# Altium PCB ETR_CELLMETER_MASTER.PcbDoc (part 3 of 3)
Units mm, origin at the board's own origin, x right, y up, seen from the top; angles counter-clockwise.
Board outline 110 x 70.06 mm, 4 copper layers (Top Layer, Top Inner, Bottom Inner, Bottom Layer), stack 0.96 mm thick; 181 components, 86 nets, 555 pads, 321 vias.
Unrouted connection lines stored in the file: 15.
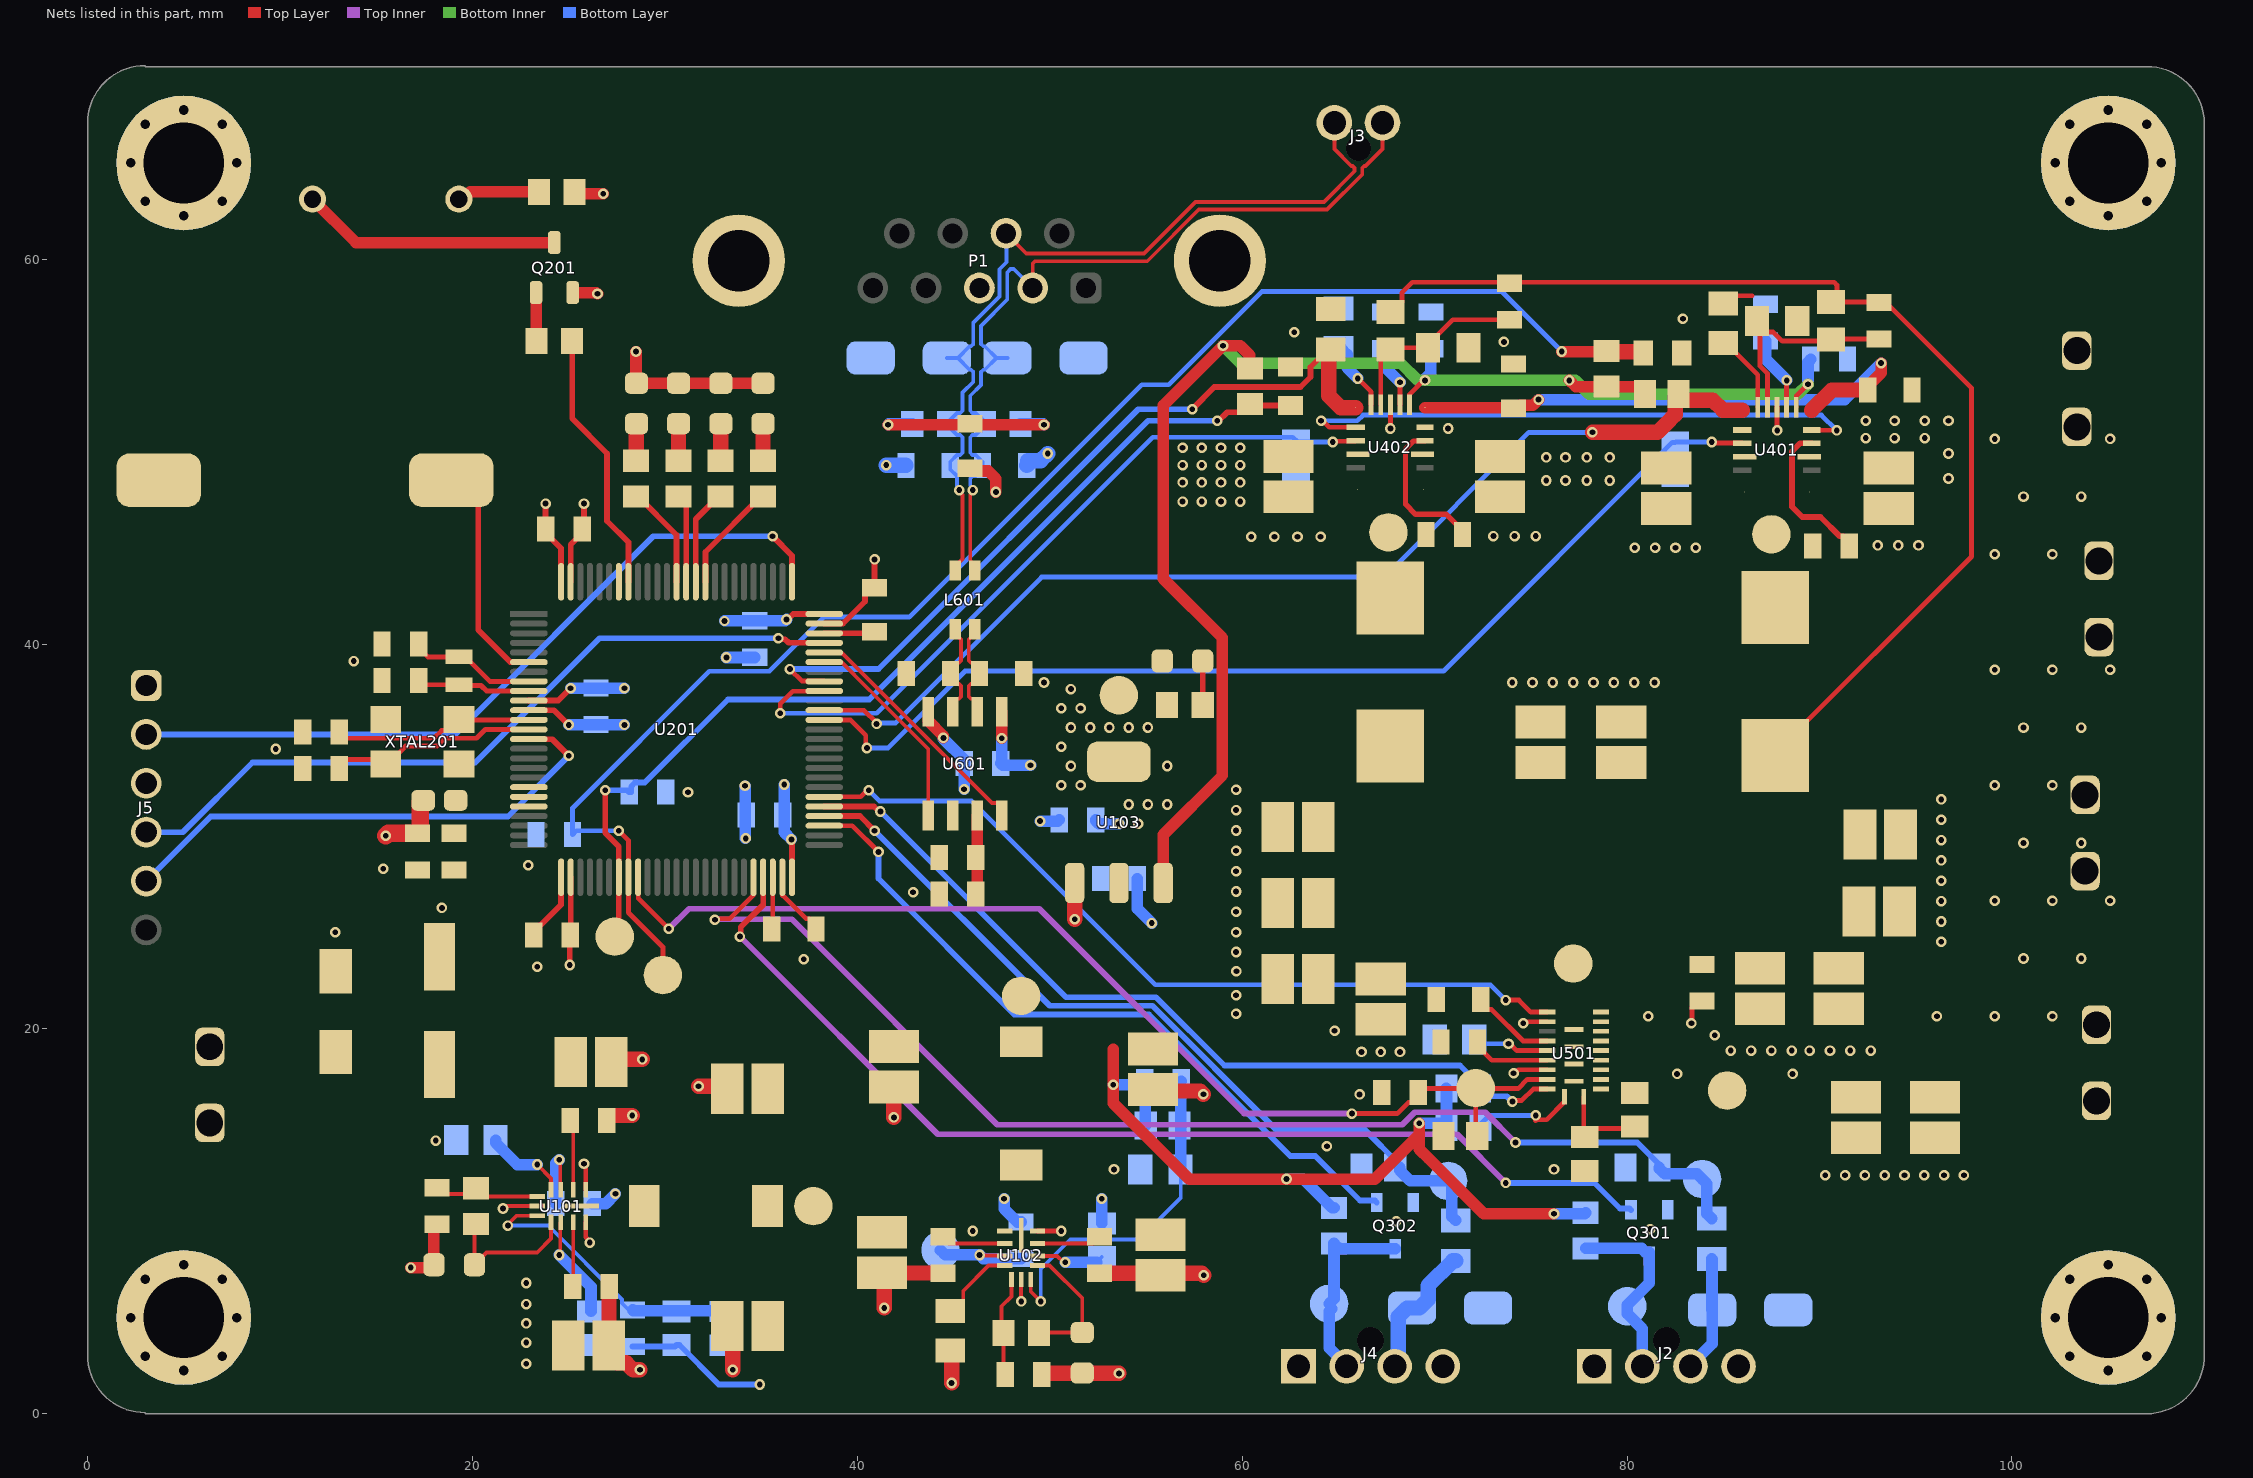
[diagram p4: the nets of this part, all layers, seen from the top]

## Part data (continued)
R601 R602: library part CMP-00080-1, "Res Thin Film 0805 60.4 Ohm 0.1% 1/8W ±25ppm/°C Molded SMD SMD Punched Carrier T/R", Case Code (Metric)=2012, Case/Package=0805, Manufacturer 1=Panasonic, Manufacturer Part Number 1=ERA-6AEB60R4V, Max Operating Temperature=155°C, Max Power Dissipation=125mW, Min Operating Temperature=-55°C, Package Quantity=5000, Resistor Type="Thin Film,Metal Film", Temperature Coefficient=25ppm/°C, Tolerance=0.1%, Voltage Rating=200V, Voltage Rating (DC)=100V, .Creator=DR, Category="Chip SMD Resistors", ComponentLink1Description=https://datasheet.ciiva.com/11811/0900766b80eb1d8c-11811180.pdf?src-supplier=RSComponents, ComponentLink1URL=https://datasheet.ciiva.com/11811/0900766b80eb1d8c-11811180.pdf?src-supplier=RSComponents, ComponentLink2Description=https://datasheet.ciiva.com/41450/001181146-da-01-en-widerstand-era-0805-60r4-0-1-5000st-41450303.pdf?src-supplier=Conrad, ComponentLink2URL=https://datasheet.ciiva.com/41450/001181146-da-01-en-widerstand-era-0805-60r4-0-1-5000st-41450303.pdf?src-supplier=Conrad, ComponentLink3Description=https://datasheet.ciiva.com/5951/485442-5951173.pdf?src-supplier=Farnell, ComponentLink3URL=https://datasheet.ciiva.com/5951/485442-5951173.pdf?src-supplier=Farnell, ComponentLink4Description=https://datasheet.ciiva.com/30184/54aoa0000ce26-30184022.pdf?src-supplier=Onlinecomponents.com, ComponentLink4URL=https://datasheet.ciiva.com/30184/54aoa0000ce26-30184022.pdf?src-supplier=Onlinecomponents.com, ComponentLink5Description=https://datasheet.ciiva.com/9188/aoa0000ce26-9188476.pdf?src-supplier=Avnet, ComponentLink5URL=https://datasheet.ciiva.com/9188/aoa0000ce26-9188476.pdf?src-supplier=Avnet, Contact Plating=Tin, Depth=1.25mm, Design Item ID=R60-0805FTN, Features="Automotive AEC-Q200", Height=0.5mm, Lead Free="Lead Free", Length=2mm, Mount="Surface Mount", Number of Terminations=2, Packaging="Tape and Reel", Pins=2, Power rating=125mW, Pricing 1="1=0,04650, 10=0,03900, 100=0,02860 (USD)", Radiation Hardening=No, RoHS=Yes, Source=Passives.SchLib, Stock 1=5000, Termination=SMD/SMT, Weight=0.000194oz, Width=1.25mm
TP101 TP102 TP103 TP104 TP201 TP202 TP301 TP302 TP303 TP304 TP401 TP402 TP403 TP501 TP502: library part CMP-00042-1, "Test Point 1x1 mm", .Creator=GP, .PCBcheck=GP, .SCHcheck=GP, Category=TestPoint, Design Item ID=TestPoint, Source=e-Tech_Racing.SchLib
U101 U102: library part CMP-031-00007-2, "MPQ4323 – 42V LOAD DUMP, 3A, LOW IQ, SYNC STEP-DOWN CONVERTER, AEC-Q100", Case/Package="QFN12 (2mmx3mm)", Max Operating Temperature=150°C, Max Supply Voltage=36V, Min Operating Temperature=-40°C, Min Supply Voltage=3.3V, Mounting Technology=SMD, Pins=12, RoHS Compliant=Yes
U103: library part LDO_10V-0.8/3V3-SOT223, "LDO Regulator Pos 3.3V 0.8A 4-Pin(3+Tab) SOT-223 T/R / IC REG LDO 3.3V 0.8A SOT223", Case/Package=SOT-223, Current Rating=800A, Dropout Voltage=1.2V, Manufacturer="Texas Instruments", Max Input Voltage=15V, Max Operating Temperature=125°C, Max Output Current=800mA, Max Supply Voltage=10V, Min Input Voltage=2.6V, Min Operating Temperature=-40°C, Min Supply Voltage=4.75V, Nominal Output Voltage=3.3V, Output Voltage Accuracy=1%, Package Quantity=1000, Quiescent Current=15mA, Supplier Part Number 1=LM1117IMP-3.3/NOPBCT-ND, .Creator=GP, Accuracy=1%, Category=LDO, ComponentLink1Description=Datasheet, ComponentLink1URL=https://www.ti.com/lit/ds/symlink/lm1117.pdf?HQS=dis-mous-null-mousermode-dsf-pf-null-wwe&DCM=yes&ref_url=https%3A%2F%2Fwww.mouser.de%2F&distId=26, ComponentLink2Description="Where buy it", ComponentLink2URL=https://www.mouser.es/ProductDetail/Texas-Instruments/LM1117IMP-33-NOPB?qs=X1J7HmVL2ZFbpN1TgOsjYQ%3D%3D, ComponentLink3Description=https://datasheet.ciiva.com/27051/1281318-27051810.pdf?src-supplier=Jameco, ComponentLink3URL=https://datasheet.ciiva.com/27051/1281318-27051810.pdf?src-supplier=Jameco, ComponentLink4Description=https://datasheet.ciiva.com/8042/1670636-8042261.pdf?src-supplier=Element14, ComponentLink4URL=https://datasheet.ciiva.com/8042/1670636-8042261.pdf?src-supplier=Element14, ComponentLink5Description=https://datasheet.ciiva.com/1570/1849796-1570171.pdf?src-supplier=Farnell, ComponentLink5URL=https://datasheet.ciiva.com/1570/1849796-1570171.pdf?src-supplier=Farnell, ComponentLink6Description=https://datasheet.ciiva.com/14149/lm1117-eng-tds-14149980.pdf?src-supplier=Distrelec, ComponentLink6URL=https://datasheet.ciiva.com/14149/lm1117-eng-tds-14149980.pdf?src-supplier=Distrelec, ComponentLink7Description=https://datasheet.ciiva.com/46386/1882372-46386042.pdf?src-supplier=Element14, ComponentLink7URL=https://datasheet.ciiva.com/46386/1882372-46386042.pdf?src-supplier=Element14, ComponentLink8Description=https://datasheet.ciiva.com/3223/lm1117-n-3223515.pdf?src-supplier=Avnet, ComponentLink8URL=https://datasheet.ciiva.com/3223/lm1117-n-3223515.pdf?src-supplier=Avnet, ComponentLink9Description=https://datasheet.ciiva.com/6580/lm1117-n-6580030.pdf?src-supplier=Digi-Key, ComponentLink9URL=https://datasheet.ciiva.com/6580/lm1117-n-6580030.pdf?src-supplier=Digi-Key, ComponentLink10Description=https://datasheet.ciiva.com/6580/lm1117-n-6580026.pdf?src-supplier=Digi-Key, ComponentLink10URL=https://datasheet.ciiva.com/6580/lm1117-n-6580026.pdf?src-supplier=Digi-Key, Height=1.6mm, Lead Free="Lead Free", Length=6.5mm, Manufacturer Part Number=LM1117IMP-3.3/NOPB, Min Current Limit=800mA, Mount="Surface Mount", Number of Outputs=1, Number of Pins=4, Number of Regulators=1, Output Current=800mA, Output Type=Fixed, Output Voltage=3.3V, Packaging="Tape and Reel", Polarity=Positive, Pricing 1="1=1,41000, 10=1,26300, 25=1,19920, 100=0,98500, 250=0,92072, 500=0,81366 (USD)", Radiation Hardening=No, REACH SVHC="No SVHC", RoHS=Yes, RoHS Compliant=Yes, Supplier 1=Digi-Key, Termination=SMD/SMT, Width=3.56mm
U201: library part CMP-031-00006-1, "RISC Microcontroller, 32-Bit, FLASH, 400MHz, CMOS, PQFP100", RoHS Compliant=Yes
U401 U402: library part CMP-00193-6, "MPQ4371GVE-1000-AEC1-Z High Voltage DCDC 10 A"
U501: library part CMP-019-00005-1, "7mΩ Protection Switch with Current Monitor for Automotive Battery Systems AEC-Q100 Qualified"
U601: library part CMP-015-00000-1, "CAN Transceiver, 1-Trnsvr, PDSO8", RoHS Compliant=Yes
V201: library part CMP-00028-00008-3, "237-8301 Portapilas para 1 pila CR1220, montaje Montaje superficial"
XTAL201: library part CMP-003-00000-1, "WE-XTAL Quartz Crystal, SMT, CFPX-104, 16MHz, +/-50ppm", Case/Package=CFPX-104, Frequency=16MHz, Frequency Stability=+/-50ppm, Load Capacitance=18pF, Manufacturer="Wurth Elektronik", Operating Temperature Max=60°C, Operating Temperature Min=-10°C, Category=Crystals, Component Type=Standard, ComponentLink1Description="Website Link", ComponentLink1URL=https://www.we-online.com/redexpert/article/830030819?ad, ComponentLink2Description="Datasheet Link", ComponentLink2URL=https://www.we-online.com/redexpert/spec/830030819?ad, Design Item ID=830030819, Frequency Tolerance=+/-50ppm, Height=1mm, Length=5mm, Manufacturer Part Number=830030819, Match Code=WE-XTAL, Mount="Surface Mount", Packaging="Tape and Reel", Pins=4, Source=WE-XTAL.SchLib, Width=3.2mm
XTAL202: library part CMP-105-000000-1, Design Item ID=XTAL_SMD_32.768kHz, Source=CommonFiles_Library.SchLib

## Via types
v1: diameter 0.55, hole 0.3, Top Layer to Bottom Layer, 277 vias
v2: diameter 0.7, hole 0.5, Top Layer to Bottom Layer, 32 vias
v3: diameter 2.5, hole 2.3, Top Layer to Bottom Layer, 5 vias
v4: diameter 4.4, hole 4.2, Top Layer to Bottom Layer, 4 vias
v5: diameter 1.4, hole 1.2, Top Layer to Bottom Layer, 1 vias
v6: diameter 1.6, hole 1.4, Top Layer to Bottom Layer, 1 vias
v7: diameter 0.5, hole 0.3, Top Layer to Bottom Layer, 1 vias

## Nets (pads, with @x,y where several pads share a name; then routed paths per layer and width w, separated by ;. In a path a pad name is that pad's centre, name@x,y a point inside that pad or via, vN(x,y) a via of type N, cw(c..) or ccw(c..) an arc to the next point about the centre after c; other vN are vias at no path point)
3V3_A: C213.2 L201.2 U201.20 U201.21
3V3_MCU: C121.2 C207.2 C208.2 C209.2 C210.2 C211.2 C212.2 C605.2 J5.1 L201.1 R111.2 R201.2 TP104.1 U103.2 U103.4 U201.11 U201.27 U201.50 U201.75 U201.100 U601.5 | length 35.4
  Top Layer w0.3: U201.11@22.932,36.56 24.24,36.56 v1(25,35.8) ; v1(23.8,47.3) 23.8,45.989 C211.2@23.815,45.974 23.815,45.774 24.607,44.982 U201.100@24.607,43.235 ; v1(25.061,23.324) 25.061,24.873 25.107,24.919 U201.27@25.107,27.885 ; v1(36.322,41.275) 36.39,41.275 36.675,41.56 U201.75@38.282,41.56 ; v1(36.576,29.845) 36.605,29.816 36.605,27.887 U201.50@36.607,27.885
  Top Layer w0.6: R201.2@25.309,63.5 25.409,63.4 v1(26.8,63.4) ; U601.5@47.498,36.482 47.498,35.102 v1(47.5,35.1)
  Top Layer w0.9: v1(15.494,30.033) 15.621,30.16 C212.2@17.145,30.16 17.297,30.16 17.297,31.787 17.387,31.877 L201.1@17.448,31.877
  Bottom Layer w0.6: v1(25,35.8) v1(27.9,35.8) ; v7(33.1,41.2) 36.247,41.2 v1(36.322,41.275) ; v1(36.2,32.7) 36.2,30.221 v1(36.576,29.845) ; v1(47.5,35.1) 47.5,33.85 C605.2@47.45,33.8 47.55,33.7 v1(49,33.7) ; C121.2@52.385,30.861 52.385,30.811 52.535,30.661 v1(53.6,30.661)
  other v1: 54.6,30.661 54.1,31.661 55.1,31.661 56.1,31.661 50.6,32.661 51.6,32.661 51.1,33.661 56.1,33.661 50.6,34.661 51.1,35.661 52.1,35.661 53.1,35.661 54.1,35.661 55.1,35.661 50.6,36.661 51.6,36.661 51.1,37.661
+5: C112.2 C113.2 C114.2 C120.2 C408.1 C420.1 C601.2 C602.2 L102.2 R107.2 R203.2 R204.2 R302.2 R305.2 R403.1 R502.2 R504.2 TP103.1 U103.3 U401.14 U402.14 U601.3 | length 126.3
  Top Layer w0.25: U402.14@68.7,52.436 U402.14@68.7,52.5 ; U402.14@68.7,52.5 68.7,52.981 69.361,53.643 69.443,53.643 v1(69.5,53.7) ; U401.14@88.789,52.303 88.789,52.889 v1(89.4,53.5)
  Top Layer w0.6: C601.2@46.15,27 46.228,27.078 U601.3@46.228,31.082 ; 53.3,18.948 53.3,16.137 57.245,12.192 62.292,12.192 v1(62.3,12.2) 62.308,12.192 66.892,12.192 69.2,14.5 ; U103.3@55.894,27.584 55.894,30.094 58.973,33.173 58.973,40.327 55.9,43.4 55.9,52.4 v1(59,55.5) 59.9,55.5 60.4,55 R204.2@60.4,54.325 ; v1(69.2,15.1) 69.2,13.756 69.703,13.253 72.556,10.4 v1(76.2,10.4) ; v1(77,53.7) 77.322,53.378 R203.2@78.939,53.378 80.65,53.378 80.925,53.103 R403.1@80.925,53
  Bottom Inner w0.6: v1(59,55.5) 59.9,54.6 68.225,54.6 69.125,53.7 v1(69.5,53.7) v1(77,53.7) 77.3,53.7 78.025,52.975 88.875,52.975 v1(89.4,53.5)
  Bottom Layer w0.6: v1(53.3,17.1) 54.78,17.1 C114.2@54.93,17.25 ; C120.2@54.544,27.813 54.544,26.256 v1(55.3,25.5) ; C114.2@54.93,17.272 54.961,17.241 54.961,15.016 R107.2@54.991,14.986 ; v1(62.3,12.2) 63.174,12.2 64.67,10.704 R305.2@64.77,10.704 ; v1(69.2,15.1) 70.425,15.1 R502.2@70.616,14.909 ; v1(69.5,53.7) 69.5,53.781 69.8,54.081 C420.1@69.8,55.35 ; R504.2@70.606,16.907 70.616,16.898 R502.2@70.616,14.909 ; R502.2@70.625,14.9 R502.2@70.616,14.909 ; v1(76.2,10.4) 77.801,10.4 R302.2@77.851,10.45 ; v1(89.4,53.5) 89.4,54.65 C408.1@89.55,54.8
+12: C102.2 C103.2 C105.2 C115.2 C116.2 C117.2 C118.2 J2.1 J4.1 L101.2 R102.2 R106.2 TP101.1 U102.2 U102.10 | length 15.5
  Top Layer w0.2: C117.2@44.45,9.205 44.798,8.857 U102.2@47.664,8.857 ; U102.10@49.364,8.857 52.23,8.857 C118.2@52.578,9.205
  Bottom Layer w0.3: C105.2@28.321,3.495 30.532,3.495 R102.2@30.607,3.57 30.757,3.57 32.803,1.524 v1(34.925,1.524)
  Bottom Layer w0.6: R106.2@52.705,9.892 v1(52.705,11.176)
+12F: C504.2 C505.2 J6.2 J7.2 J8.2 J9.2 R501.2 TP501.1 U501.12 U501.13 U501.14 U501.15 U501.16 U501.17 U501.18 U501.19 U501.20
  other v1: 82.6,17.661 88.6,17.661 81.1,20.661 96.1,20.661 99.1,20.661 102.1,20.661 100.6,23.661 103.6,23.661 99.1,26.661 102.1,26.661 105.1,26.661 100.6,29.661 103.6,29.661 99.1,32.661 102.1,32.661 100.6,35.661 103.6,35.661 99.1,38.661 102.1,38.661 105.1,38.661 99.1,44.661 102.1,44.661 100.6,47.661 103.6,47.661 99.1,50.661 105.1,50.661
+12S: C404.1 C405.1 C406.1 C407.1 C414.1 C415.1 C416.1 C417.1 C421.2 C422.2 C501.2 C502.2 C503.2 L401.2 L402.2 R402.1 R407.1 TP402.1 U501.21 U501.22 U501.23 U501.24 U501.25 | length 57.7
  Top Layer w0.25: R407.1@67.7,57.254 67.796,57.254 68.3,57.758 68.3,58.254 68.846,58.8 73.9,58.8 90.754,58.8 90.9,58.654 90.9,58.077 R402.1@90.6,57.777 93.423,57.777 97.9,53.3 97.9,44.55 87.7,34.35 L401.2@87.7,34.2
+24: C104.1 C106.2 C107.2 C108.2 C109.2 C402.1 C403.1 C412.1 C413.1 D101.2 J1.2 R101.2 R401.1 R406.1 U101.2 U101.10 U401.4 U401.10 U402.4 U402.10 | length 7
  Top Layer w0.2: C109.2@25.085,15.24 25.24,15.085 U101.2@25.24,11.645 ; C108.2@25.212,6.604 25.24,6.632 U101.10@25.24,9.945
  other v1: 22.8,2.6 22.8,3.7 22.8,4.7 22.8,5.7 22.8,6.8 56.9,47.4 57.9,47.4 58.9,47.4 59.9,47.4 56.9,48.4 57.9,48.4 58.9,48.4 59.9,48.4 75.8,48.5 76.8,48.5 77.9,48.5 79.1,48.5 96.7,48.6 56.9,49.3 57.9,49.3 58.9,49.3 59.9,49.3 75.8,49.7 76.8,49.7 77.9,49.7 79.1,49.7 96.7,49.9 56.9,50.2 57.9,50.2 58.9,50.2 59.9,50.2 92.4,50.7 93.9,50.7 95.467,50.7 92.4,51.6 93.9,51.6 95.467,51.6 96.7,51.6
Buzzer: R207.1 U201.93 | length 13.7
  Top Layer w0.3: R207.1@25.182,55.753 25.182,51.723 27,49.905 27,46.4 28.107,45.293 U201.93@28.107,43.235
CAN1_H: C604.2 D601.2 J3.1 L601.2 P1.7 R601.2 | length 44.4
  Top Layer w0.2: L601.2@45.093,43.816 45.093,44.041 45.466,44.414 45.466,47.761 ; P1.7@47.728,61.341 48.778,60.291 54.9,60.291 57.58,62.971 64.245,62.971 65.84,64.566 65.84,64.732 65.723,64.849 65.667,64.849 64.79,65.726 J3.1@64.79,67.089
  Bottom Layer w0.2: D601.2@44.647,54.864 D601.2@45.223,54.864 ; v1(45.3,48) 45.3,48.095 45.181,48.213 45.181,48.726 44.831,49.076 C604.2@44.831,49.276 44.831,49.474 45.181,49.824 45.349,49.824 45.466,49.941 45.466,50.745 45.349,50.862 45.181,50.862 44.706,51.337 R601.2@44.706,51.435 44.706,51.533 45.181,52.008 45.349,52.008 45.466,52.125 45.466,53.069 46.028,53.63 46.028,54.135 45.911,54.253 45.834,54.253 D601.2@45.223,54.864 ; P1.7@47.728,61.341 47.752,61.317 47.752,59.837 47.393,59.478 47.393,58.066 46.028,56.701 46.028,55.593 45.911,55.475 45.834,55.475 D601.2@45.223,54.864
CAN1_L: C608.1 D602.1 J3.2 L601.3 P1.2 R602.1 | length 44.4
  Top Layer w0.2: v1@45.866,47.761 45.866,44.358 45.893,44.331 45.893,44.016 L601.3@46.093,43.816 ; P1.2@49.113,58.501 49.113,59.774 49.23,59.891 55.065,59.891 57.745,62.571 64.411,62.571 66.24,64.4 66.24,64.732 66.357,64.849 66.413,64.849 67.29,65.726 J3.2@67.29,67.089
  Bottom Layer w0.2: v1(46,48) 46,48.095 45.866,48.229 45.866,48.609 45.983,48.726 46.151,48.726 46.501,49.076 C608.1@46.501,49.276 46.501,49.474 46.151,49.824 45.983,49.824 45.866,49.941 45.866,50.745 45.983,50.862 46.151,50.862 46.626,51.337 R602.1@46.626,51.435 46.626,51.533 46.151,52.008 45.983,52.008 45.866,52.125 45.866,52.903 46.428,53.465 46.428,54.135 46.545,54.253 46.622,54.253 D602.1@47.233,54.864 ; D602.1@47.809,54.864 D602.1@47.233,54.864 ; P1.2@49.113,58.501 48.13,59.484 47.965,59.484 47.793,59.312 47.793,57.9 46.428,56.535 46.428,55.593 46.545,55.475 46.622,55.475 D602.1@47.233,54.864
CAN_FIL_H: C603.1 L601.1 U601.7 | length 5.2
  Top Layer w0.2: U601.7@44.958,36.482 44.958,36.957 45.158,37.157 45.276,37.157 45.393,37.274 45.393,37.814 45.276,37.931 45.188,37.931 44.838,38.281 C603.1@44.838,38.481 44.838,38.681 45.188,39.031 45.276,39.031 45.393,39.148 45.393,40.241 45.093,40.541 L601.1@45.093,40.766
CAN_FIL_L: C607.2 L601.4 U601.6 | length 5.2
  Top Layer w0.2: L601.4@46.093,40.766 46.093,40.541 45.793,40.241 45.793,39.148 45.91,39.031 45.998,39.031 46.348,38.681 C607.2@46.348,38.481 46.348,38.281 45.998,37.931 45.91,37.931 45.793,37.814 45.793,37.274 45.91,37.157 46.028,37.157 46.228,36.957 U601.6@46.228,36.482
F_EN: U201.56 U501.1 | length 42.5
  Top Layer w0.25: U201.56@38.282,32.06 40.179,32.06 40.519,32.4 v1(40.6,32.4) ; v1(73.7,21.5) 74.378,21.5 75.001,20.877 U501.1@75.845,20.877
  Bottom Layer w0.25: v1(40.6,32.4) 41.15,31.85 45.928,31.85 55.478,22.3 72.9,22.3 v1(73.7,21.5)
F_FAULT: R504.1 U201.55 U501.9 | length 44.3
  Top Layer w0.25: v1(74.039,16.228) 74.097,16.285 74.529,16.285 75.12,16.877 U501.9@75.845,16.877
  Top Layer w0.3: U201.55@38.282,31.56 40.872,31.56 41.132,31.3 v1(41.2,31.3)
  Bottom Layer w0.3: v1(41.2,31.3) 50.85,21.65 55.527,21.65 59.077,18.1 71.313,18.1 72.356,17.057 R504.1@72.356,16.907 72.763,16.5 73.743,16.5 74.015,16.228 v1(74.039,16.228)
F_IMON: C508.2 R506.2 TP502.1 U201.34 U501.8 | length 57.2
  Top Layer w0.25: U201.34@28.607,27.885 28.619,27.873 28.619,26.781 v1(30.2,25.2) ; v1(65.7,15.6) 68.05,15.6 68.625,16.175 68.825,16.175 69.15,16.5 C508.2@69.15,16.7 69.35,16.9 TP502.1@72.139,16.9 ; R506.2@72.214,14.428 72.139,14.503 TP502.1@72.139,16.9 ; U501.8@75.845,17.377 74.811,17.377 74.334,16.9 TP502.1@72.139,16.9
  Top Inner w0.3: v1(30.2,25.2) 31.25,26.25 49.45,26.25 60.1,15.6 v1(65.7,15.6)
GND: C102.1 C103.1 C104.2 C106.1 C107.1 C108.1 C109.1 C110.1 C112.1 C113.1 C115.1 C116.1 C117.1 C118.1 C119.1 C120.1 C121.1 C201.2 C202.2 C203.1 C204.1 C205.1 C206.1 C207.1 C208.1 C209.1 C210.1 C211.1 C212.1 C213.1 C214.1 C215.1 C402.2 C403.2 C404.2 C405.2 C406.2 C407.2 C408.2 C409.2 C410.1 C412.2 C413.2 C414.2 C415.2 C416.2 C417.2 C418.2 C419.1 C420.2 C501.1 C502.1 C503.1 C504.1 C505.1 C506.1 C507.1 C508.1 C601.1 C602.1 C603.2 C604.1 C605.1 C606.2 C607.1 C608.2 D101.1 D102.K D103.K D104.K D201.K D202.K D203.K D204.K D301.1 D302.1 D601.1 D602.2 J1.1 J2.4 J4.4 J5.3 J6.1 J7.1 J8.1 J9.1 MH1.1 MH2.1 MH3.1 MH4.1 NTC201.1 NTC202.1 P1.3 P1.M1 P1.M2 Q201.E Q301.S Q302.S R104.1 R105.1 R109.1 R110.1 R303.1 R306.1 R404.1 R405.2 R408.2 R409.1 R410.2 R503.1 R505.1 R506.1 U101.1 U101.6 U101.11 U102.1 U102.6 U102.11 U103.1 U201.10 U201.19 U201.26 U201.49 U201.74 U201.94 U201.99 U401.2 U401.6 U401.8 U401.16 U402.6 U402.8 U402.12 U402.16 U501.2 U501.7 U601.2 U601.8 V201.2 XTAL201.2 XTAL201.4 | length 100.2
  Top Layer w0.2: v1(21.59,10.668) 21.685,10.668 21.812,10.795 U101.6@23.365,10.795 ; v1(48.514,5.842) U102.6@48.514,6.982
  Top Layer w0.25: v1(25.8,13) 25.8,12.919 25.89,12.829 U101.1@25.89,11.645 ; U101.11@25.89,9.945 25.89,9.185 26.1,8.975 v1(26.1,8.9) ; U201.49@36.107,27.885 36.119,27.873 36.119,26.941 37.335,25.725 37.525,25.725 37.85,25.4 C201.2@37.85,25.2 ; U102.11@49.364,9.507 50.593,9.507 v1(50.6,9.5) ; v1(67.7,51.2) 67.7,51.85 U402.16@67.7,52.436 ; v1(74.1,17.7) 74.181,17.7 74.358,17.877 U501.7@75.845,17.877 ; v1(74.6,20.3) 74.681,20.3 74.758,20.377 U501.2@75.845,20.377 ; v1(83.343,20.3) 83.375,20.332 83.375,21.125 83.7,21.45 C503.1@83.9,21.45 ; R405.2@84.998,57.687 85.411,58.1 86.5,58.1 ; U401.16@87.789,52.303 87.789,51.111 v1(87.8,51.1)
  Top Layer w0.3: U201.10@22.932,37.06 24.46,37.06 v1(25.1,37.7) ; C208.1@23.18,24.892 23.18,25.092 23.48,25.392 23.542,25.392 24.607,26.457 U201.26@24.607,27.885 ; U201.99@25.107,43.235 25.107,45.166 25.715,45.774 C211.1@25.715,45.974 25.8,46.059 v1(25.8,47.3) ; U201.74@38.282,41.06 38.285,41.062 39.251,41.062 40.394,42.205 40.394,42.633 40.694,42.933 C202.2@40.894,42.933 40.9,42.939 v1(40.9,44.4)
  Top Layer w0.6: v1(16.8,7.6) 17.853,7.6 D103.K@18,7.747 18,9.695 18.084,9.779 18.095,9.779 C110.1@18.161,9.845 ; Q201.E@25.207,58.263 26.437,58.263 v1(26.5,58.2) ; v1(28.5,55.2) 28.5,53.575 D204.K@28.525,53.55 D203.K@30.717,53.55 D202.K@32.908,53.55 D201.K@35.1,53.55 ; U601.8@43.688,36.482 43.688,36.007 44.472,35.223 v1(44.472,35.121) ; C606.2@45.847,49.142 45.997,48.992 46.808,48.992 47.2,48.6 v1(47.2,47.9)
  Top Layer w0.8: C109.1@26.985,15.24 26.985,15.44 27.035,15.49 27.235,15.49 27.245,15.5 v1(28.3,15.5) ; C108.1@27.112,6.604 27.099,6.591 27.099,3.569 C106.1@27.086,3.556 27.086,3.104 27.537,2.653 27.989,2.653 28.356,2.286 v1(28.702,2.286) ; C107.1@27.213,18.288 27.34,18.415 v1(28.829,18.415) ; v1(31.75,17.018) 33.112,17.018 C102.1@33.239,16.891 ; C103.1@33.239,4.572 33.528,4.283 v1(33.528,2.286) ; C115.1@41.275,7.331 C115.1@41.288,7.318 ; v1(41.4,5.5) 41.4,7.206 C115.1@41.288,7.318 ; v1(41.9,15.4) 41.9,16.973 C112.1@41.91,16.983 ; C117.1@44.45,7.305 44.437,7.318 C115.1@41.288,7.318 ; R110.1@44.831,3.293 44.9,3.224 v1(44.9,1.6) ; C119.1@49.591,2.032 49.591,2.05 49.641,2.1 v1(53.6,2.1) ; U103.1@51.294,27.584 51.3,27.578 v1(51.3,25.7) ; C118.1@52.578,7.305 57.895,7.305 v1(58,7.2) ; C113.1@55.372,16.856 55.455,16.773 57.814,16.773 v1(57.984,16.602)
  Bottom Layer w0.3: v1(34.163,32.639) v1@34.182,32.62 ; v1@34.182,29.918 v1(34.2,29.9)
  Bottom Layer w0.6: v1(25.1,37.7) v1(27.9,37.7) ; v1(33.2,39.3) 34.662,39.3 C209.1@34.671,39.309 ; v1@34.182,29.918 v1@34.182,32.62 ; v1(44.472,35.121) 44.472,35.078 45.55,34 v1@45.55,32.45 ; v1(49.5,30.8) 50.424,30.8 C121.1@50.485,30.861
  Bottom Layer w0.8: v1(41.5,49.3) 42.507,49.3 C604.1@42.531,49.276 ; C608.2@48.801,49.276 48.851,49.326 48.851,49.526 49.526,49.526 v1(49.9,49.9)
  other v1: 46,9.5 81.2,9.6 68,10 90.3,12.4 91.329,12.4 92.357,12.4 93.386,12.4 94.414,12.4 95.443,12.4 96.471,12.4 97.5,12.4 53.34,12.7 76.2,12.7 64.4,13.9 18.1,14.2 66.1,16.6 66.2,18.807 67.2,18.807 68.2,18.807 85.385,18.875 86.442,18.875 87.499,18.875 88.556,18.875 89.485,18.875 90.542,18.875 91.599,18.875 92.656,18.875 84.556,19.675 64.8,19.9 59.68,20.784 59.68,21.75 59.7,23 23.368,23.229 37.211,23.622 59.68,23.998 96.32,24.527 12.873,25.02 59.68,25.027 96.32,25.584 59.68,26.084 18.415,26.289 96.32,26.641 42.9,27.1 59.68,27.141 96.32,27.698 59.68,28.198 15.367,28.321 22.9,28.5 96.32,28.756 59.68,29.256 96.32,29.813 59.68,30.313 96.32,30.87 59.68,31.37 96.32,31.927 31.2,32.3 59.68,32.427 45.549,32.449 9.779,34.544 49.7,38 74.027,38 75.084,38 76.141,38 77.198,38 78.256,38 79.313,38 80.37,38 81.427,38 13.831,39.116 80.4,45.007 81.457,45.007 82.514,45.007 83.571,45.007 93.027,45.127 94.084,45.127 95.141,45.127 60.473,45.58 61.673,45.58 62.873,45.58 64.073,45.58 73.054,45.607 74.154,45.607 75.254,45.607 70.7,51.2 73.6,55.7 62.7,56.2 82.9,56.9
  other v2: 5,2.25 105,2.25 3,3 7,3 103,3 107,3 2.25,5 7.75,5 102.25,5 107.75,5 3,7 7,7 103,7 107,7 5,7.75 105,7.75 5,62.25 105,62.25 3,63 7,63 103,63 107,63 2.25,65 7.75,65 102.25,65 107.75,65 3,67 7,67 103,67 107,67 5,67.75 105,67.75
  other v4: 5,5 105,5 5,65 105,65
ICS: C410.2 C419.2 U401.13 U402.13 | length 29.5
  Top Layer w0.6: U402.13@69.5,52.286 74.064,52.286 C410.2@74.1,52.25 ; C410.2@74.3,52.25 74.45,52.4 75.1,52.4 v1(75.4,52.7) ; C419.2@92.5,53.2 92.5,53.4 93.2,54.1 v1(93.2,54.6)
  Top Layer w0.8: U401.13@89.589,52.153 90.636,53.2 C419.2@92.5,53.2
  Bottom Layer w0.6: v1(75.4,52.7) 91.3,52.7 v1(93.2,54.6)
LF_XTAL_IN: C206.2 U201.8 XTAL202.2 | length 6.6
  Top Layer w0.25: C206.2@17.206,40.005 17.206,39.805 17.678,39.333 XTAL202.2@19.304,39.333 19.629,39.333 20.902,38.06 U201.8@22.932,38.06
LF_XTAL_OUT: C215.2 U201.9 XTAL202.1 | length 5.9
  Top Layer w0.25: C215.2@17.206,38.1 17.423,37.883 XTAL202.1@19.304,37.883 19.341,37.846 20.447,37.846 20.733,37.56 U201.9@22.932,37.56
M_EN: R401.2 U201.64 U401.3 | length 55.3
  Top Layer w0.25: U201.64@38.282,36.06 38.294,36.048 39.652,36.048 40.443,35.257 40.443,34.657 v1(40.5,34.6) ; v1(84.4,50.5) 84.447,50.453 85.964,50.453 U401.3@85.989,50.428
  Bottom Layer w0.25: v1(40.5,34.6) 41.6,34.6 45.6,38.6 70.475,38.6 82.35,50.475 R401.2@82.5,50.475 82.525,50.5 v1(84.4,50.5)
M_PG: R403.2 U201.65 U401.1 | length 55.9
  Top Layer w0.25: U201.65@38.282,36.56 40.34,36.56 41,35.9 v1(41,35.85)
  Top Layer w0.8: v1(78.2,51) 81.581,51 82.05,51.469 82.5,51.919 82.5,52.825 R403.2@82.665,52.99 ; R403.2@82.675,52.85 82.85,52.675 84.45,52.675 84.972,52.153 U401.1@85.989,52.153
  Bottom Layer w0.25: v1(41,35.85) 41.05,35.9 42,35.9 49.579,43.479 67.379,43.479 74.9,51 v1(78.2,51)
NetC101_1: C101.1 U101.3 | length 4
  Top Layer w0.2: v1(24.511,13.208) 24.565,13.154 24.565,11.67 U101.3@24.59,11.645
  Bottom Layer w0.6: C101.1@24.323,10.922 24.323,13.02 v1(24.511,13.208)
NetC101_2: C101.2 L101.1 U101.12 | length 1.4
  Bottom Layer w0.6: C101.2@26.223,10.922 26.924,10.922 v1(27.432,11.43)
NetC105_1: C105.1 R102.1 R104.2 U101.7 | length 15
  Top Layer w0.2: v1(21.844,9.779) 21.844,9.848 22.287,10.291 23.361,10.291 U101.7@23.365,10.295
  Bottom Layer w0.2: v1(21.844,9.779) 23.937,9.779 27.771,5.945 27.771,5.745 28.121,5.395 C105.1@28.321,5.395 ; R104.2@32.946,5.395 32.983,5.358 R104.2@33.02,5.321
  Bottom Layer w0.6: C105.1@28.321,5.395 28.358,5.358 30.607,5.358 R104.2@32.983,5.358
NetC110_2: C110.2 R103.1 U101.5 | length 5.6
  Top Layer w0.2: C110.2@18.161,11.745 18.476,11.43 19.903,11.43 R103.1@20.193,11.72 20.618,11.295 U101.5@23.365,11.295
NetC111_1: C111.1 TP102.1 U102.3 | length 5.7
  Top Layer w0.2: v1(46.355,8.255) 46.379,8.231 47.64,8.231 U102.3@47.664,8.207
  Bottom Layer w0.6: TP102.1@44.323,8.509 44.577,8.255 v1(46.355,8.255) 46.543,8.067 C111.1@48.514,8.067
NetC111_2: C111.2 L102.1 U102.12 | length 1.7
  Bottom Layer w0.6: v1(47.625,11.176) 47.625,10.656 48.314,9.967 C111.2@48.514,9.967
NetC114_1: C114.1 R107.1 R109.2 U102.7 | length 17.9
  Top Layer w0.2: U102.7@49.014,6.982 49.014,6.358 v1(49.53,5.842)
  Bottom Layer w0.2: v1(49.53,5.842) 49.53,7.53 51.067,9.067 54.66,9.067 56.803,11.21 R109.2@56.803,12.7
  Bottom Layer w0.6: R109.2@56.803,12.7 56.817,12.714 56.817,17.258 C114.1@56.83,17.272
NetC119_2: C119.2 R108.1 U102.5 | length 5.2
  Top Layer w0.2: C119.2@47.691,2.032 47.589,2.134 R108.1@47.589,4.191 47.498,4.282 47.498,5.588 48.014,6.104 U102.5@48.014,6.982
NetC201_1: C201.1 U201.48 | length 2.7
  Top Layer w0.25: U201.48@35.607,27.885 35.607,25.343 C201.1@35.75,25.2
NetC202_1: C202.1 U201.73 | length 2.6
  Top Layer w0.3: U201.73@38.282,40.56 40.821,40.56 C202.1@40.894,40.633
NetC401_1: C401.1 U401.11 | length 8
  Top Layer w0.3: U401.11@89.589,50.428 88.99,50.428 88.564,50.002 88.564,47.136 89.1,46.6 90.05,46.6 91.05,45.6 91.25,45.6 91.55,45.3 C401.1@91.55,45.1
NetC401_2: C401.2 L401.1 TP401.1 U401.7
NetC409_1: C409.1 U401.15 | length 3.9
  Top Layer w0.25: U401.15@88.289,52.303 88.289,53.689 v1(88.3,53.7)
  Bottom Layer w0.6: C409.1@87.2,55.75 87.2,54.8 v1(88.3,53.7)
NetC411_1: C411.1 U402.11 | length 7.8
  Top Layer w0.28: U402.11@69.5,50.561 69.49,50.551 68.904,50.551 68.485,50.131 68.485,47.273 69.016,46.741 70.609,46.741 71.45,45.9 C411.1@71.45,45.7
NetC411_2: C411.2 L402.1 TP403.1 U402.7
NetC418_1: C418.1 U402.15 | length 3.2
  Top Layer w0.25: U402.15@68.2,52.436 v1(68.2,53.6)
  Bottom Layer w0.6: C418.1@67.4,55.35 67.449,55.301 67.449,54.351 v1(68.2,53.6)
NetC421_1: C421.1 R402.2 R404.2 U401.17 | length 11.6
  Top Layer w0.25: U401.17@87.289,52.303 87.289,54.062 86.9,54.451 86.9,56.631 R404.2@86.742,56.789 86.742,56.708 87.242,56.208 87.592,56.208 88.061,55.739 90.516,55.739 R402.2@90.6,55.823 90.627,55.85 C421.1@93.1,55.85
NetC422_1: C422.1 R407.2 R409.2 U402.17 | length 10
  Top Layer w0.25: U402.17@67.2,52.436 67.2,54.8 R407.2@67.7,55.3 67.8,55.4 R409.2@69.65,55.4 69.65,55.55 70.95,56.85 C422.1@73.9,56.85
NetC506_2: C506.2 U501.4 | length 3.8
  Top Layer w0.25: C506.2@72.714,21.003 72.964,21.003 74.59,19.377 U501.4@75.845,19.377
NetC507_2: C507.2 U501.6 | length 3.9
  Top Layer w0.25: C507.2@72.226,19.12 72.969,18.377 U501.6@75.845,18.377
NetC606_1: C606.1 R601.1 R602.2 | length 10.6
  Top Layer w0.6: v1(41.6,51.4) v1(49.7,51.4)
  Bottom Layer w0.6: v1(41.6,51.4) 41.635,51.435 R601.1@42.856,51.435 ; R602.2@48.476,51.435 49.665,51.435 v1(49.7,51.4)
NetD104_A: D104.A R111.1 | length 2.3
  Top Layer w0.3: D104.A@57.946,39.116 57.946,36.832 R111.1@57.948,36.83
NetD201_A: D201.A R202.2 | length 1.9
  Top Layer w0.8: R202.2@35.1,49.525 D201.A@35.1,51.45
NetD202_A: D202.A R205.2 | length 1.9
  Top Layer w0.8: R205.2@32.9,49.525 32.904,49.529 32.904,51.446 D202.A@32.908,51.45
NetD203_A: D203.A R206.2 | length 1.9
  Top Layer w0.8: R206.2@30.7,49.525 30.708,49.533 30.708,51.442 D203.A@30.717,51.45
NetD204_A: D204.A R208.2 | length 1.9
  Top Layer w0.8: R208.2@28.5,49.525 28.512,49.537 28.512,51.437 D204.A@28.525,51.45
NetLS201_N: LS201.N Q201.C | length 13.5
  Top Layer w0.6: LS201.N@11.694,63.119 13.95,60.863 Q201.C@24.257,60.863
NetLS201_P: LS201.P R201.1 | length 4.3
  Top Layer w0.6: LS201.P@19.294,63.119 19.513,63.119 19.894,63.5 R201.1@23.459,63.5
NetQ201_B: Q201.B R207.2 | length 2.5
  Top Layer w0.6: Q201.B@23.307,58.263 23.32,58.251 23.32,55.765 R207.2@23.332,55.753
NetQ301_G: Q301.G U201.47 | length 55.8
  Top Layer w0.3: v1(33.9,24.8) 33.948,24.848 33.948,25.298 35.107,26.457 U201.47@35.107,27.885
  Top Inner w0.3: v1(33.9,24.8) 44.175,14.525 71.175,14.525 v1(73.7,12)
  Bottom Layer w0.3: v1(73.7,12) 78.3,12 79.629,10.671 80.13,10.671 Q301.G@80.203,10.598
NetQ302_G: Q302.G U201.53 | length 37.6
  Top Layer w0.25: U201.53@38.282,30.56 39.74,30.56 v1(41.1,29.2)
  Bottom Layer w0.3: v1(41.1,29.2) 41.1,27.81 48.16,20.75 55.15,20.75 62.499,13.401 63.799,13.401 66.12,11.08 66.894,11.08 Q302.G@66.995,10.979
NetR101_1: R101.1 U101.9 | length 5.3
  Top Layer w0.2: v1(24.511,8.255) 24.565,8.309 24.565,9.92 U101.9@24.59,9.945
  Bottom Layer w0.6: v1(24.511,8.255) 26.162,6.604 R101.1@26.162,5.32
NetR105_2: R105.2 U101.4 | length 4.4
  Top Layer w0.2: v1(23.368,12.954) 24.09,12.232 U101.4@24.09,11.645
  Bottom Layer w0.6: R105.2@21.209,14.224 21.209,14.074 22.329,12.954 v1(23.368,12.954)
NetR106_1: R106.1 U102.9 | length 3.6
  Top Layer w0.2: U102.9@49.364,8.207 50.372,8.207 50.705,7.874 v1(50.8,7.874)
  Bottom Layer w0.2: R106.1@52.437,7.874 R106.1@52.705,8.142
  Bottom Layer w0.6: v1(50.8,7.874) R106.1@52.437,7.874
NetR110_2: R110.2 U102.4 | length 4.1
  Top Layer w0.2: R110.2@44.831,5.343 44.981,5.343 45.506,5.868 45.506,6.39 46.823,7.707 U102.4@47.664,7.707
NetR301_1: R301.1 R303.2 TP302.1 U201.46 | length 63.3
  Top Layer w0.25: v1(32.6,25.675) 32.646,25.721 33.375,25.721 34.595,26.941 34.595,27.873 U201.46@34.607,27.885
  Top Inner w0.3: v1(32.6,25.675) 32.625,25.7 36.6,25.7 47.275,15.025 68.312,15.025 68.962,15.675 72.625,15.675 v1(74.2,14.1)
  Bottom Layer w0.3: v1(74.2,14.1) 80.525,14.1 81.675,12.95 R303.2@81.675,12.8
  Bottom Layer w0.6: R303.2@81.675,12.8 81.675,12.743 81.95,12.468 83.632,12.468 TP302.1@83.9,12.2 84.15,11.95 84.15,10.4 R301.1@84.4,10.15
NetR304_1: R304.1 R306.2 TP304.1 U201.54 | length 42.7
  Top Layer w0.3: U201.54@38.282,31.06 40.14,31.06 v1(40.9,30.3)
  Bottom Layer w0.3: v1(40.9,30.3) 50,21.2 55.336,21.2 61.749,14.788 66.337,14.788 68.175,12.95 R306.2@68.175,12.8
  Bottom Layer w0.6: R306.2@68.175,12.8 68.175,12.65 68.725,12.1 TP304.1@70.7,12.1 70.9,11.9 70.9,10.25 R304.1@71.1,10.05
NetR405_1: R405.1 U401.18 | length 4.2
  Top Layer w0.25: R405.1@84.998,55.637 85.148,55.637 86.789,53.996 U401.18@86.789,52.303
NetR410_1: R410.1 U402.18 | length 3.7
  Top Layer w0.25: v1(66,53.8) 66.7,53.1 U402.18@66.7,52.436
  Bottom Layer w0.6: R410.1@65,55.375 65.124,55.375 65.449,55.05 65.449,54.351 v1(66,53.8)
NetR501_1: R501.1 R505.2 U501.11 | length 5
  Top Layer w0.25: U501.11@77.745,16.477 77.745,14.43 R505.2@77.8,14.375 78.25,14.825 80.3,14.825 R501.1@80.4,14.925
NetR502_1: R502.1 U501.10 | length 5.4
  Top Layer w0.25: 75.239,15.228 75.297,15.285 75.829,15.285 76.745,16.202 U501.10@76.745,16.477
  Bottom Layer w0.25: R502.1@72.375,14.9 72.375,15.05 72.825,15.5 75.251,15.5 v1(75.258,15.507)
NetR503_2: R503.2 U501.5 | length 3.7
  Top Layer w0.25: v1(73.839,19.228) 73.921,19.228 74.272,18.877 U501.5@75.845,18.877
  Bottom Layer w0.25: R503.2@72.275,19.228 v1(73.839,19.228)
NetU201_70: U201.70 U601.1 | length 10.7
  Top Layer w0.2: U201.70@38.282,39.06 38.304,39.038 39.2,39.038 40.513,37.725 40.517,37.725 40.825,37.417 40.825,37.413 43.688,34.55 U601.1@43.688,31.082
NetU201_71: U201.71 U601.4 | length 13
  Top Layer w0.2: U201.71@38.282,39.56 39.134,39.56 39.191,39.504 39.238,39.504 47,31.742 47.298,31.742 47.498,31.542 U601.4@47.498,31.082
NRST: J5.5 U201.14 | length 27.1
  Top Layer w0.3: U201.14@22.932,35.06 22.934,35.058 24.142,35.058 v1(25,34.2)
  Bottom Layer w0.3: J5.5@3.048,27.686 6.405,31.043 21.843,31.043 v1(25,34.2)
NTC1_ADC: C203.2 NTC201.2 R203.1 TP201.1 U201.33 | length 80.4
  Top Layer w0.25: v1(27.6,30.3) 28.107,29.793 U201.33@28.107,27.885 28.107,26.05 29.9,24.257 TP201.1@29.9,22.8
  Top Layer w0.6: v1(76.6,55.2) R203.1@78.911,55.2
  Top Layer w0.8: R203.1@78.939,55.228 78.989,55.178 80.789,55.178 NTC201.2@80.839,55.128
  Bottom Layer w0.25: v1(27.6,30.3) 25.4,30.3 C203.2@25.2,30.1 25.2,31.478 32.306,38.584 35.435,38.584 38.251,41.4 42.7,41.4 54.776,53.476 56.181,53.476 61.03,58.325 73.475,58.325 v1(76.6,55.2)
NTC2_ADC: C204.2 NTC202.2 R204.1 TP202.1 U201.32 | length 52.1
  Top Layer w0.3: v1(26.9,32.4) 26.9,30.187 27.607,29.48 U201.32@27.607,27.885 27.605,27.882 27.605,25.005 TP202.1@27.4,24.8 ; v1(58.7,51.6) 58.768,51.6 59.218,52.05 59.975,52.05 R204.1@60.4,52.475 60.475,52.4 NTC202.2@62.5,52.4
  Bottom Layer w0.3: v1(26.9,32.4) 28.05,32.4 C204.2@28.15,32.3 ; C204.2@28.25,32.3 28.25,32.6 28.45,32.8 28.95,32.8 33.275,37.125 40.625,37.125 55.1,51.6 v1(58.7,51.6)
OSC_IN: C205.2 U201.12 XTAL201.1 | length 10.4
  Top Layer w0.25: C205.2@13.081,35.433 13.081,35.425 13.406,35.1 18,35.1 18.4,35.5 18.724,35.5 XTAL201.1@19.299,36.075 ; XTAL201.1@19.314,36.06 U201.12@22.932,36.06
OSC_OUT: C214.2 U201.13 XTAL201.3 | length 11
  Top Layer w0.25: C214.2@13.081,33.528 13.081,33.675 13.406,34 15.274,34 XTAL201.3@15.499,33.775 15.599,33.775 16.524,34.7 18.168,34.7 18.568,35.1 20.213,35.1 20.673,35.56 U201.13@22.932,35.56
PG_5V: D102.A R108.2 U102.8 | length 7.1
  Top Layer w0.2: U102.8@49.364,7.707 49.993,7.707 51.689,6.011 D102.A@51.689,4.225 49.473,4.225 R108.2@49.439,4.191
PG_12V: D103.A R103.2 U101.8 | length 7.6
  Top Layer w0.2: R103.2@20.193,9.87 20.1,9.777 D103.A@20.1,7.747 20.735,8.382 23.368,8.382 24.09,9.104 U101.8@24.09,9.945
PWM_FAN1: J2.2 Q301.D R302.1 TP301.1 | length 10.1
  Bottom Layer w0.6: R302.1@77.851,8.6 80.751,8.6 80.953,8.398 81.153,8.398 Q301.D@81.153,8.198 81.153,6.798 80.01,5.655 TP301.1@80.01,5.588 80.01,5.209 80.792,4.427 J2.2@80.792,2.47
PWM_FAN2: J4.2 Q302.D R305.1 TP303.1 | length 10
  Bottom Layer w0.6: TP303.1@64.516,5.715 64.77,5.969 R305.1@64.77,8.854 65.045,8.579 Q302.D@67.945,8.579 ; TP303.1@64.643,5.463 64.516,5.336 64.516,3.421 65.425,2.512 J4.2@65.425,2.47
RPM_FAN1: D301.2 J2.3 R301.2 | length 6.1
  Bottom Layer w0.6: J2.3@83.292,2.47 83.292,2.517 84.425,3.65 D301.2@84.425,5.4 84.412,5.413 84.412,8.037 R301.2@84.4,8.05
RPM_FAN2: D302.2 J4.3 R304.2 | length 7.3
  Bottom Layer w0.8: J4.3@67.925,2.47 68.116,2.661 68.116,5.052 68.564,5.5 D302.2@68.825,5.5 69.211,5.5 69.66,5.948 69.66,6.66 70.95,7.95 R304.2@71.1,7.95
S_EN: R406.2 U201.67 U402.3 | length 39
  Top Layer w0.25: v1(36,36.4) 36,36.9 36.648,37.548 38.271,37.548 U201.67@38.282,37.56 ; v1(64.7,50.5) 64.736,50.536 65.875,50.536 U402.3@65.9,50.561
  Bottom Layer w0.25: v1(36,36.4) 41,36.4 55.35,50.75 62.625,50.75 62.875,50.5 v1(64.7,50.5)
S_PG: R408.1 U201.68 U402.1 | length 41.3
  Top Layer w0.25: v1(36.5,38.7) 37.128,38.072 38.271,38.072 U201.68@38.282,38.06
  Top Layer w0.3: v1(57.4,52.2) 58.55,53.35 63.024,53.35 63.55,53.875 63.55,54.4 64.45,55.3 R408.1@64.6,55.3
  Top Layer w0.8: R408.1@64.5,55.2 64.5,52.9 65.114,52.286 U402.1@65.9,52.286
  Bottom Layer w0.3: v1(36.5,38.7) 41.1,38.7 54.6,52.2 v1(57.4,52.2)
SWCLK: J5.2 U201.76 | length 39.6
  Top Layer w0.3: v1(35.6,45.6) 36.607,44.593 U201.76@36.607,43.235
  Bottom Layer w0.3: J5.2@3.048,35.306 19.106,35.306 29.4,45.6 v1(35.6,45.6)
SWDIO: J5.4 U201.72 | length 39.5
  Top Layer w0.3: v1(35.9,40.3) 35.948,40.252 36.246,40.252 36.436,40.062 38.28,40.062 U201.72@38.282,40.06
  Bottom Layer w0.3: J5.4@3.048,30.226 4.952,30.226 8.568,33.842 20.142,33.842 26.6,40.3 v1(35.9,40.3)
SYNCOUT: U401.12 U402.2 | length 30.5
  Top Layer w0.25: v1(64.1,51.6) 64.181,51.6 64.52,51.261 U402.2@65.9,51.261 ; U401.12@89.589,51.128 89.603,51.114 90.886,51.114 v1(90.9,51.1)
  Bottom Layer w0.25: v1(64.1,51.6) 65.979,51.6 66.279,51.9 90.1,51.9 v1(90.9,51.1)
U_LED_1: R202.1 U201.85 | length 5.7
  Top Layer w0.3: U201.85@32.107,43.235 32.107,44.782 35,47.675 R202.1@35.1,47.675
U_LED_2: R205.1 U201.86 | length 5
  Top Layer w0.3: U201.86@31.607,43.235 31.607,46.482 32.8,47.675 R205.1@32.9,47.675
U_LED_3: R206.1 U201.87 | length 4.6
  Top Layer w0.3: R206.1@30.7,47.675 31.107,47.268 U201.87@31.107,43.235
U_LED_4: R208.1 U201.88 | length 5.4
  Top Layer w0.3: R208.1@28.5,47.675 28.6,47.675 30.607,45.668 U201.88@30.607,43.235
VBAT: U201.6 V201.1 | length 9.7
  Top Layer w0.3: 20.3,47.1 20.3,40.725 21.963,39.062 22.929,39.062 U201.6@22.932,39.06
pads on no net: J2.0 J3. J4.0 J5.6 P1.1 P1.4 P1.5 P1.6 P1.8 P1.9 U201.1 U201.2 U201.3 U201.4 U201.5 U201.7 U201.15 U201.16 U201.17 U201.18 U201.22 U201.23 U201.24 U201.25 U201.28 U201.29 U201.30 U201.31 U201.35 U201.36 U201.37 U201.38 U201.39 U201.40 U201.41 U201.42 U201.43 U201.44 U201.45 U201.51 U201.52 U201.57 U201.58 U201.59 U201.60 U201.61 U201.62 U201.63 U201.66 U201.69 U201.77 U201.78 U201.79 U201.80 U201.81 U201.82 U201.83 U201.84 U201.89 U201.90 U201.91 U201.92 U201.95 U201.96 U201.97 U201.98 U401.5 U401.9 U402.5 U402.9 U501.3
copper on no net:
  other v3: 1.85,17.093 99.894,18.236 108.3,30.18 100.021,42.343 107.869,53.265
  other v5: 7.703,48.514
  other v6: 15.203,48.514

## Polygon pours and split planes (outlines as drawn)
GND on Top Layer "GND_L01_P099" (solid, pour order 99): 0,3.061 0,67.061 cw(c3,67.061) 3,70.061 3,70 107,70 cw(c107.03,67.03) 110,67.061 110,3.061 cw(c106.97,3.03) 107,0 107,-0.004 3,0.061 cw(c3,3.061)
+24 on Top Layer "+24_L01_P091_DIRECT" (solid, pour order 91): 68.7,49.6 70.1,49.6 71.4,48.3 80.7,48.3 84.2,48.3 85.4,49.5 86.7,49.5 86.7,50 75.5,50 74.8,50.7 70.7,50.7 70.1,50.1 68.7,50.1
+12F on Top Layer "+12F_L01_P087_DIRECT" (solid, pour order 88): 78.3,16.6 79,15.9 90.6,15.9 90.9,15.6 99.9,15.6 102.9,18.6 105.6,18.6 105.6,52.3 104.8,53 104.7,53 97.6,53 97.6,23.7 92.9,19 83.6,19 81.4,21.2 78.1,21.2 78.1,16.8
+24 on Top Layer "+24_L01_P092_DIRECT" (solid, pour order 92): 88.8,49.5 91.2,49.5 92.5,48.2 97.9,48.2 97.9,50.3 97.4,50.8 97.4,52.1 92.1,52.1 91.7,51.7 91.7,50.4 90.6,50.4 90.2,49.9 90,49.9 88.8,49.9
+24 on Top Layer "+24_L01_P033_DIRECT" (solid, remove dead copper, pour order 33): 15.113,7.332 20.748,1.698 25.781,1.698 25.781,20.494 15.113,20.494
+5 on Top Layer "+5_L01_P037" (solid, pour order 37): 39.624,18.161 57.531,18.161 57.531,24.765 39.624,24.765
+24 on Top Layer "+24_L01_P093_DIRECT" (solid, pour order 93): 56.4,50.6 56.4,47.1 60.3,47.1 60.3,48 61.2,48.9 64.7,48.9 65.4,49.6 66.7,49.6 66.7,50.1 64.2,50.1 63.7,50.6
+12S on Top Layer "+12S_L01_P086_DIRECT" (solid, pour order 86): 66,36.6 72,36.6 74.1,34.7 74.3,34.7 84.6,34.7 86,36.1 89.5,36.1 89.5,34.7 93.1,31.4 93.1,22.9 92.4,22.3 92.2,22.3 78.5,22.3 77.8,21.6 77.8,17.1 76.7,17.1 76.6,17.2 76.6,21.7 74.2,21.7 73.2,22.7 69,22.7 69,22.4 68.3,21.7 65.1,21.7 64.7,21.3 63.1,21.3 63.1,32 65.9,34.8 65.9,36.5
NetC401_2 on Top Layer "NETC411_2_L01_P084_DIRECT" (solid, pour order 85): 87.4,49.6 87.4,47.1 85.9,45.6 85.9,40.2 89.6,40.2 89.6,45.7 88.2,47.1 88.2,49.6
NetC411_2 on Top Layer "NETC411_2_L01_P084_DIRECT" (solid, pour order 84): 67.3,49.7 67.3,47.2 65.8,45.7 65.8,40.3 69.5,40.3 69.5,46.4 68.7,47.2 68.1,47.2 68.1,49.7
NetC101_2 on Top Layer "NETC101_2_L01_P034_DIRECT" (solid, pour order 34): 24.765,10.922 26.035,10.922 27.637,12.095 29.931,12.095 29.931,9.495 29.901,9.525 27.432,9.525 26.035,10.668 24.765,10.668
NetC111_2 on Top Layer "NETC111_2_L01_P035_DIRECT" (solid, pour order 35): 48.387,8.382 48.387,9.652 47.214,10.825 47.214,13.929 49.814,13.929 49.814,10.825 48.641,9.652 48.641,8.382
+12 on Top Layer "+12_L01_P036" (solid, pour order 36): 34.417,18.288 34.417,0.381 60.198,0.381 60.198,11.557 52.324,11.557 52.324,7.874 46.101,7.747 41.656,12.192 38.227,12.192 38.227,18.288
+5 on Top Layer "+5_L01_P038" (solid, pour order 38): 45.212,27.432 45.212,24.003 47.625,24.003 47.625,27.432
+5 on Top Layer "+5_L01_P039" (solid, pour order 39): 54.864,29.337 54.864,23.749 57.531,23.749 57.531,29.337
+12 on Top Layer "+12_L01_P040" (solid, pour order 40): 59.944,3.937 79.756,3.937 79.756,0.381 78.994,0.381 59.944,0.381
3V3_MCU on Top Layer "3V3_MCU_L01_P041" (solid, pour order 41): 52.4,26.6 52.4,29.261 49.657,32.004 49.657,38.608 54.483,38.608 55.245,37.846 56.896,37.846 56.769,37.719 56.769,31.877 54.8,29.908 54.8,26.6
+24 on Top Layer "+24_L01_P046_DIRECT" (solid, pour order 46): 5.579,17.9 16.256,17.9 16.256,19.8 5.579,19.8
3V3_A on Top Layer "3V3_A_L01_P047_DIRECT" (solid, pour order 47): 18.288,29.591 18.288,32.512 20.066,32.512 20.534,32.2 24.003,32.2 24.003,31.4 19.812,31.4 19.812,29.591
GND on Bottom Layer "GND_L04_P101" (solid, pour order 101): 0,3.061 0,67.061 cw(c3,67.061) 3,70.061 3,70 107,70 cw(c107.03,67.03) 110,67.061 110,3.061 cw(c106.97,3.03) 107,0 107,-0.004 3,0.061 cw(c3,3.061)
+24 on Bottom Layer "+24_L04_P098_DIRECT" (solid, pour order 98): 81.8,49.3 91.6,49.3 91.6,51.3 92.2,51.9 97.2,51.9 97.2,49 96.4,48.2 81.8,48.2
+24 on Bottom Layer "+24_L04_P044" (solid, pour order 44): 26.924,4.318 26.924,1.905 20.701,1.905 17.272,5.334 15.706,6.9 22.6,6.9 25.4,4.318
+24 on Bottom Layer "+24_L04_P097_direct" (solid, pour order 97): 63.4,48.2 62.4,47.2 56.7,47.2 56.4,47.5 56.4,50.5 60.3,50.5 61.4,49.4 63.6,49.4 63.6,48.2
GND on Bottom Inner "GND_L03_P100" (solid, pour order 100): 0,3.061 0,67.061 cw(c3,67.061) 3,70.061 3,70 107,70 cw(c107.03,67.03) 110,67.061 110,3.061 cw(c106.97,3.03) 107,0 107,-0.004 3,0.061 cw(c3,3.061)
+24 on Bottom Inner "+24_L03_P096_DIRECT" (solid, pour order 96): 4.4,20 4.4,19.8 4.4,12.8 7.8,12.8 19.5,1.1 50.4,1.1 97.4,48.1 97.4,52 56.6,52 56.6,28.7 48.2,20.3 4.4,20.3
+12F on Bottom Inner "+12F_L01_P087_DIRECT" (solid, pour order 87): 78.2,16.6 78.9,15.9 90.5,15.9 90.8,15.6 99.8,15.6 102.8,18.6 105.5,18.6 105.5,52.3 104.7,53.1 104.6,53 97.5,53 97.5,23.7 92.8,19 83.5,19 81.3,21.2 78,21.2 78,16.8
3V3_MCU on Bottom Inner "3V3_MCU_L03_P073" (solid, pour order 73): 27.7,53.3 56.4,53.3 56.4,29.1 31.6,29.1 25.4,22.9 20.4,27.9 14.7,27.9 14.7,30.3 1.5,36.7 1.5,66.2 27.7,66.2
GND on Top Inner "GND_L02_P075" (solid, pour order 75): 0,3.061 0,67.061 cw(c3,67.061) 3,70.061 3,70 107,70 cw(c107.03,67.03) 110,67.061 110,3.061 cw(c106.97,3.03) 107,0 3,0 3,0.061 cw(c3,3.061)

## Silkscreen, mask and mechanical layers (free items; w line width, h text height)
Top Overlay:
  drawing of 38 lines, arcs and shapes, not listed
  text "Bernat Costa Cesari 2024" at 72.403,67.4 h3
  text "ETR Cellmeter Master v1" at 72.303,65.1 h3
  text "CAN" at 64,60 h3
  text "S1" at 96.903,53.6 h3
  text "S2" at 96.003,41.2 h3
  text "3V3" at 5.202,37.5 h2
  text "CLK" at 5.1,35 h2
  text "GND" at 5.2,32.3 h2
  text "DIO" at 5.202,29.7 h2
  text "S3" at 96.903,28.3 h3
  text "NRST" at 5.202,27.3 h2
  text "S4" at 95.103,17.8 h3
  text "SUPPLY" at 1.503,9.6 h3
  text "FAN2" at 76.503,7.5 h3
  text "FAN1" at 61.103,7.4 h3
Mechanical 1:
  lines w0.15: 3,70 107,70 cw(c107.031,67.03) 110,67.061 110,3.061 cw(c106.97,3.03) 107,0 ; 3,70.061 ccw(c3,67.061) 0,67.061 0,3.061 ccw(c3,3.061) 3,0.061 107,-0.004

## Text inside footprints (layer, text, board x,y; h text height)
C104: Top Overlay "+" at 17.788,16.105 h1.5 r270
LS201: Top Overlay "-" at 8.9,61 h1.5 r180; Top Overlay "+" at 22.9,66.5 h1.5 r180
P1: Top Component Outline "PCB Edge" at 49.743,71.041 h1.5 r180
V201: Top Overlay "-" at 9.304,48.187 h1.5; Top Overlay "+" at 12.827,47.87 h1.5